# Altium PCB mainboard.PcbDoc (part 2 of 2)
Units mm, origin at the board's own origin, x right, y up, seen from the top; angles counter-clockwise.
Board outline 90.17 x 95.89 mm, 4 copper layers (F.Cu, Route2, Route15, B.Cu), stack 1.545 mm thick; 95 components, 76 nets, 509 pads, 249 vias.
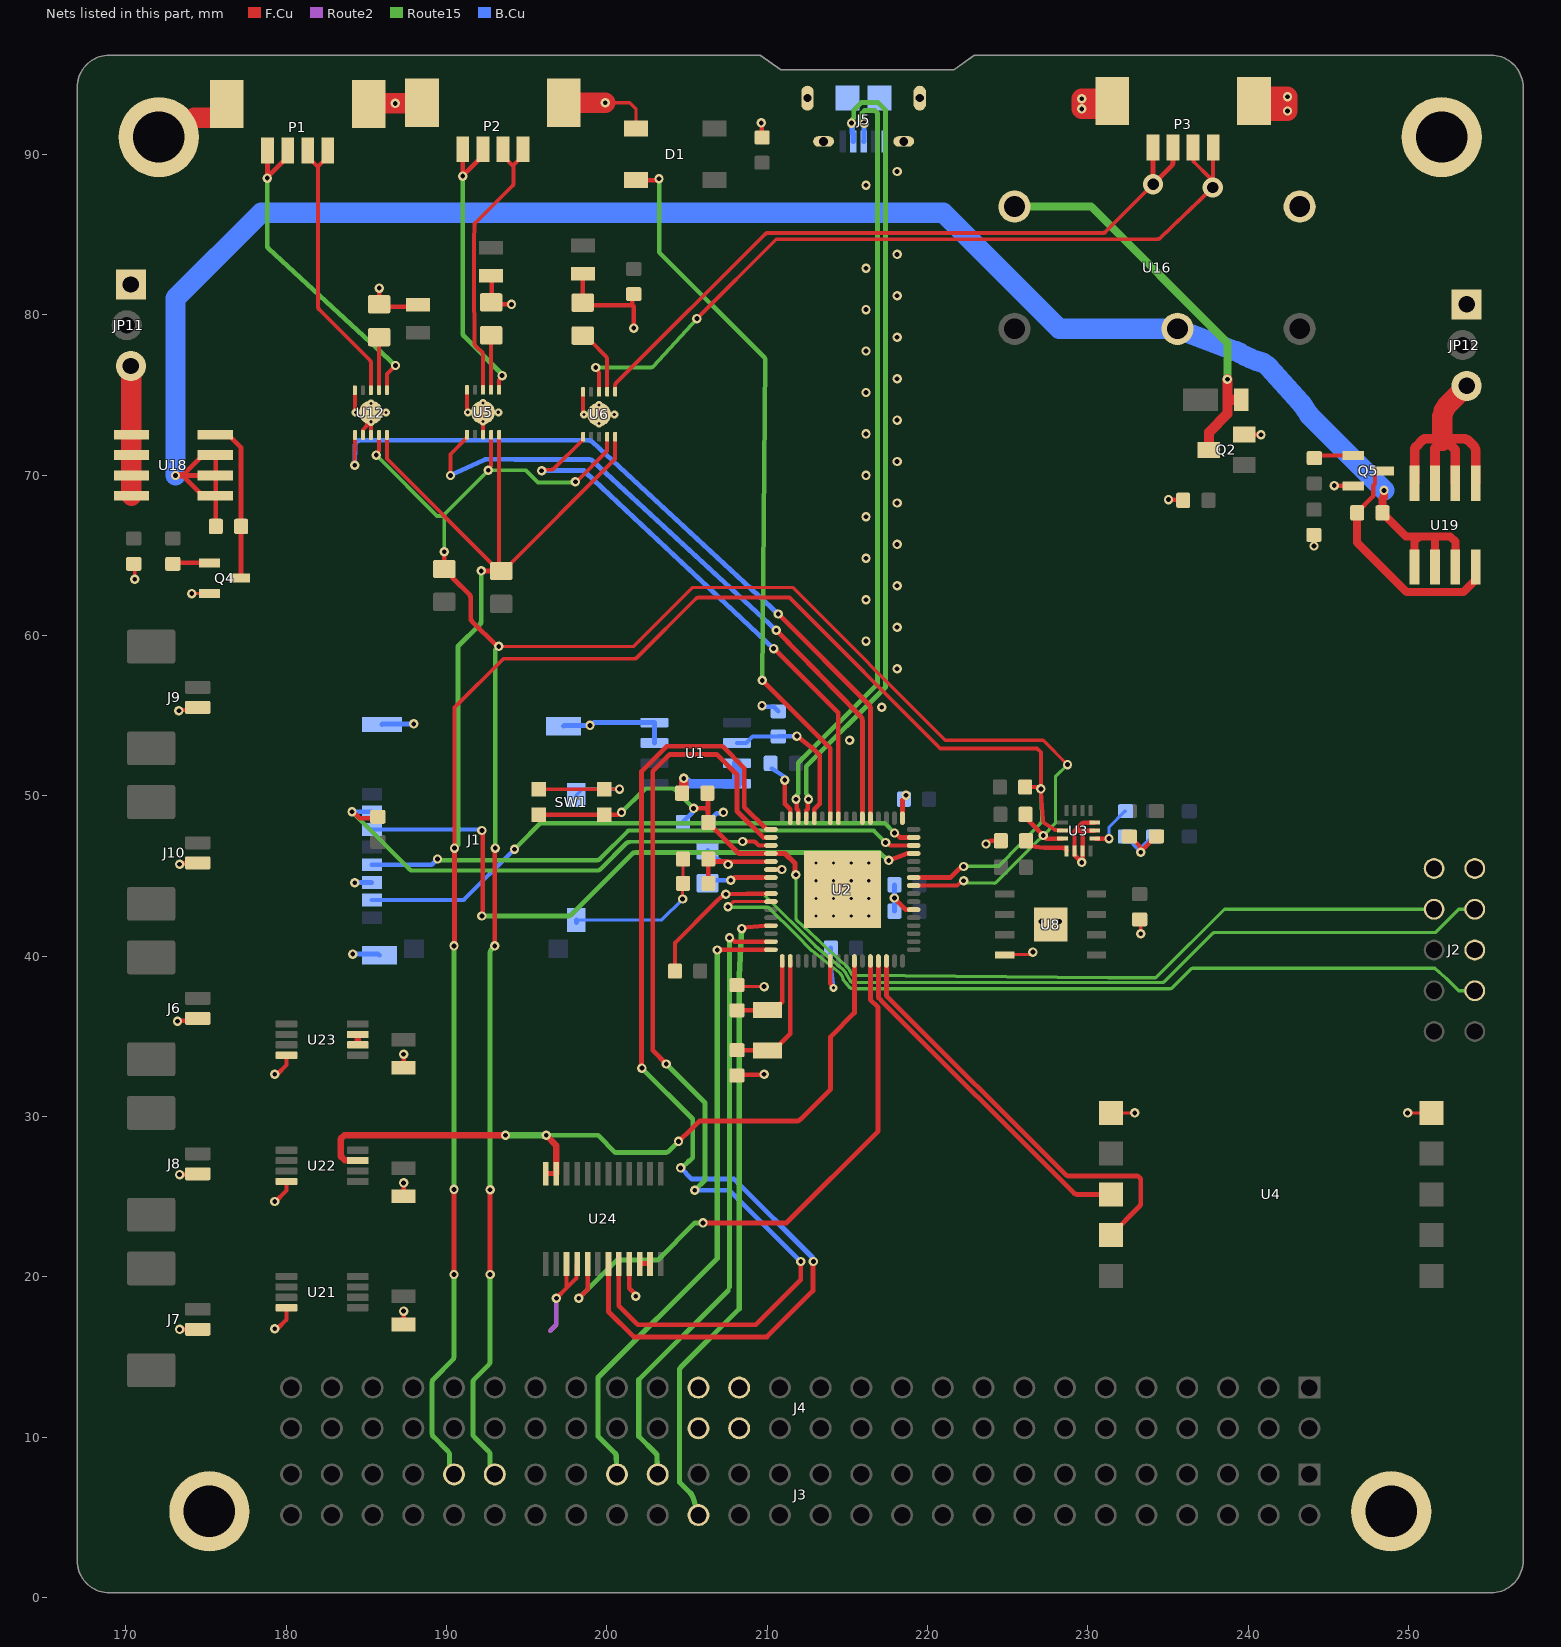
[diagram p4: the nets of this part, all layers, seen from the top]

## Via types
v1: diameter 0.584, hole 0.3, F.Cu to B.Cu, 176 vias
v2: diameter 0.584, hole 0.3, F.Cu to B.Cu, tented both sides, 42 vias
v3: diameter 0.5, hole 0.2, F.Cu to B.Cu, 29 vias
v4: diameter 1.27, hole 0.711, F.Cu to B.Cu, 2 vias

## Nets (pads, with @x,y where several pads share a name; then routed paths per layer and width w, separated by ;. In a path a pad name is that pad's centre, name@x,y a point inside that pad or via, vN(x,y) a via of type N, cw(c..) or ccw(c..) an arc to the next point about the centre after c; other vN are vias at no path point) (continued)
GB04: U2.10 U22.7 U24.23 U24.24 | length 46.9
  F.Cu w0.3: U24.24@196.19,26.441 U24.23@196.85,26.441 ; v1(204.47,28.448) 205.263,29.208 ccw(c205.055,29.424) 205.268,29.212 205.773,29.718 211.839,29.718 ccw(c211.839,30.018) 212.051,29.806 213.953,31.708 213.953,34.978 215.434,36.46 U2.10@215.434,39.702
  F.Cu w0.4: U22.7@184.47,27.249 184.445,27.274 183.658,27.274 183.395,27.537 183.395,28.595 183.629,28.829 v1(193.675,28.829) ; v1(196.215,28.829) 196.85,28.194 U24.23@196.85,26.441
  Route15 w0.3: v1(196.215,28.829) 199.456,28.829 200.533,27.752 203.65,27.752 ccw(c203.65,28.052) 203.862,27.84 v1(204.47,28.448)
  Route15 w0.4: v1(193.675,28.829) v1(196.215,28.829)
GB05: U24.10 U24.11 | length 0.7
  F.Cu w0.3: U24.10@202.057,20.803 202.085,20.83 202.685,20.83 202.692,20.838 U24.11@202.692,20.803
GND: C1.2 C2.2 C3.2 C4.1 C5.2 C7.2 C9.1 C10.2 C11.2 C12.1 C13.2 C14.2 C15.2 C16.2 C30.2 C31.2 C32.2 C33.2 C41.1 C42.1 C43.1 C44.2 D1.3 H1.1 H2.1 H3.1 H4.1 J1.6 J1.P1 J1.P2 J1.P3 J1.P4 J1.P5 J2.3 J2.5 J2.10 J4.29 J4.30 J4.31 J4.32 J5.5 J5.S1 J5.S2 J5.S3 J5.S4 J5.S5 J5.S6 J6.2 J7.2 J8.2 J9.2 J10.2 JP11.1 JP12.1 P1.MP1 P1.MP2 P2.MP1 P2.MP2 P3.MP1 P3.MP2 Q2.2 Q4.2 Q5.2 R2.1 R7.1 R25.2 R27.2 R28.2 R41.2 R69.2 R70.2 R71.2 SW1.B SW1.B' U1.3 U1.4 U2.7 U2.22 U2.33 U2.47 U2.54 U2.65 U3.2 U3.3 U3.6 U3.7 U4.5 U4.6 U5.5 U5.8 U5.11 U6.5 U6.11 U8.4 U8.9 U12.5 U12.7 U12.8 U12.11 U16.12 U21.4 U22.4 U23.4 U24.3 U24.4 U24.9 | length 142.8
  F.Cu w0.203: R27.2@170.495,64.466 170.561,64.401 v1(170.561,63.5) ; v1(174.117,62.611) 174.123,62.617 175.214,62.617 Q4.2@175.22,62.623 ; SW1.B@195.743,50.413 SW1.B'@199.843,50.413 200.192,50.419 v1(200.787,50.419) ; v1(199.898,93.218) 201.422,93.218 201.82,92.82 D1.3@201.82,91.599 ; v1(204.724,43.561) 204.724,44.504 C14.2@204.753,44.533 C12.1@204.753,46.057 ; C1.2@208.109,38.198 208.449,38.107 ccw(c208.5,38.303) 208.5,38.1 v1(209.804,38.1) ; U8.4@224.81,40.066 225.308,40.082 225.315,40.082 ccw(c225.315,40.285) 225.32,40.082 226.354,40.115 ccw(c226.347,40.318) 226.495,40.179 v1(226.565,40.253) ; U4.6@231.427,30.226 v1(232.918,30.226) ; C30.2@233.226,42.294 C30.2@233.239,42.281 ; C30.2@233.24,42.28 cw(c233.096,42.137) 233.299,42.137 v1(233.299,41.402) ; v1(249.936,30.226) U4.5@251.427,30.226
  F.Cu w0.24: U12.5@184.285,75.298 184.285,74.018 184.335,73.968 v3(184.335,73.898) ; U12.7@184.785,72.498 184.785,72.823 185.047,73.085 185.047,73.323 v3(185.285,73.323) U12.8@185.285,72.498 ; U5.5@191.278,75.314 191.278,74.06 ccw(c191.518,74.061) v3(191.328,73.914) ; U5.8@192.278,72.514 v3(192.278,73.339) ; U6.5@198.517,75.187 198.517,73.907 198.567,73.857 v3(198.567,73.787)
  F.Cu w0.272: v1@179.288,24.658 180.02,25.389 U22.4@180.02,25.949 ; v1@179.451,16.764 180.02,17.333 U21.4@180.02,18.075 ; v1@179.451,32.639 180.02,33.208 U23.4@180.02,33.823 ; v1(185.801,81.661) 185.801,80.504 188.192,80.504 C41.1@188.214,80.482 ; C33.2@187.325,17.032 v1(187.325,17.862) ; C31.2@187.325,25.033 v1(187.325,25.863) ; C32.2@187.325,33.048 v1(187.325,33.878) ; C42.1@192.786,82.437 192.814,82.148 192.814,80.645 v1(194.056,80.645) ; v1(196.85,18.669) 197.485,19.304 ; U24.3@197.485,20.803 197.485,19.304 ; U24.4@198.145,20.803 198.103,20.761 198.103,19.922 197.485,19.304 ; C43.1@198.501,82.564 198.501,80.609 198.493,80.601 201.593,80.601 ; U24.9@201.397,20.803 201.397,19.287 201.803,18.88 v1(201.803,18.796) ; v1(201.676,79.167) 201.676,80.518 201.593,80.601 ; C44.2@201.676,81.281 201.593,81.198 201.593,80.601 ; v1(209.623,91.961) 209.65,91.934 209.65,91.081 C5.2@209.677,91.053 ; v1(223.645,46.998) 223.762,47.105 ccw(c223.578,47.305) 223.77,47.113 223.771,47.114 cw(c223.963,46.922) 223.963,47.194 R41.2@224.565,47.194 ; v1@229.659,46.029 v1(229.616,45.847) 229.177,46.286 229.177,46.556 U3.2@229.166,46.567 229.166,47.709 ; v1@229.659,46.029 ccw(c229.395,46.091) 229.666,46.09 U3.3@229.666,46.567 229.666,47.802 229.693,47.829 ; U3.6@230.428,47.829 229.693,47.829 ; U3.7@230.428,48.329 229.786,48.329 ccw(c229.786,48.057) 229.595,48.25 229.245,47.9 ccw(c229.438,47.709) 229.166,47.709 ; C7.2@232.579,47.463 232.616,47.463 233.239,46.84 233.239,46.542 v1(233.299,46.482) 233.299,46.533 234.233,47.467 C3.2@234.27,47.467 ; v1(235.025,68.469) 235.641,68.469 R25.2@235.942,68.424 ; Q2.2@239.735,72.527 239.745,72.517 v1(240.789,72.517) ; v1(244.094,65.576) R28.2@244.094,66.269 ; v1(245.364,69.342) 245.378,69.328 246.531,69.328 Q5.2@246.545,69.313 ; 229.166,47.709 229.286,47.829 229.693,47.829
  F.Cu w0.3: v1(173.228,35.941) 173.255,35.968 174.458,35.968 J6.2@174.485,35.995 ; v1(173.311,55.308) 174.159,55.433 cw(c174.203,55.136) 174.203,55.436 174.412,55.436 J9.2@174.485,55.509 ; v1(173.355,16.726) J7.2@174.747,16.726 ; v1(173.355,26.378) J8.2@174.747,26.378 ; v1(173.355,45.73) 173.397,45.772 174.443,45.772 J10.2@174.485,45.813 ; C2.2@208.109,32.559 208.149,32.599 209.764,32.599 v1(209.804,32.639) ; U2.54@210.234,45.402 v1(210.917,45.402) ; v2(211.095,50.978) 211.095,49.496 211.434,49.156 U2.47@211.434,48.602 ; U2.7@213.934,39.702 213.934,38.283 214.129,38.089 v3(214.129,38.027) ; v1(217.93,43.626) 217.93,43.624 218.652,42.902 U2.22@219.134,42.902 ; U2.33@218.434,48.602 218.434,49.733 218.656,49.955 v2(218.656,50.032)
  F.Cu w1.27: H1.1@172.061,91.078 173.07,91.078 174.271,92.279 175.881,92.279 176.296,92.694 P1.MP2@176.296,93.144 ; P1.MP1@185.146,93.144 185.183,93.181 v1(186.807,93.181) 188.431,93.181 P2.MP2@188.468,93.218 ; P2.MP1@197.318,93.218 v1(199.898,93.218) ; v1(229.616,92.837) 231.096,92.837 231.511,93.252 P3.MP2@231.511,93.324 231.096,93.472 v1(229.616,93.472) v1(229.616,92.837) ; P3.MP1@240.361,93.117 240.776,92.702 v1(242.443,92.702) v1(242.443,93.599) 240.776,93.599 P3.MP1@240.361,93.324 P3.MP1@240.361,93.117
  Route2 w0.272: 196.469,16.637 196.85,17.018 v1(196.85,18.669)
  B.Cu w0.203: J1.P5@198.097,42.26 203.423,42.26 v1(204.724,43.561) ; J1.P4@198.097,50.04 198.477,50.419 v1(200.787,50.419) ; C15.2@218.516,49.784 218.508,50.027 218.513,50.032 v2(218.656,50.032)
  B.Cu w0.272: C13.2@210.28,51.7 211.19,51.13 211.095,51.035 v2(211.095,50.978) ; C10.2@213.97,40.513 213.97,39.28 ccw(c214.241,39.28) 213.971,39.252 214.015,38.821 ccw(c214.285,38.849) 214.016,38.811 v3(214.129,38.027) ; C9.1@232.337,47.463 232.375,47.463 233.299,46.539 v1(233.299,46.482) 233.359,46.542 233.359,46.757 234.065,47.463 R2.1@234.103,47.463
  B.Cu w0.3: v1(184.154,40.13) 185.747,40.13 J1.P2@185.822,40.055 ; v1@184.288,44.588 185.331,44.588 J1.6@185.342,44.6 ; J1.P1@185.972,54.445 186.011,54.483 v1(187.96,54.483) ; J1.P3@197.302,54.345 197.351,54.393 v1(198.947,54.393) 199.024,54.393 199.197,54.566 U1.4@202.965,54.566 U1.3@202.965,53.296 ; J1.P5@198.097,42.085 J1.P5@198.097,42.26 ; C4.1@206.328,48.343 206.328,48.38 206.857,48.909 207.086,48.909 ccw(c207.086,49.209) v1(207.264,48.968) ; v1(209.677,55.626) 209.754,55.626 209.822,55.558 210.405,55.558 R7.1@210.693,55.27 ; C11.2@217.93,42.801 v1(217.93,43.626) C16.2@217.93,44.451
  other v1: 179.288,16.764 179.288,24.701 179.288,32.639 227.076,42.164 228.219,42.164 184.277,44.577 215.138,53.467 217.14,55.526 218.101,57.925 216.16,59.647 218.101,60.509 216.16,62.231 218.101,63.093 216.16,64.815 218.101,65.677 216.16,67.399 218.101,68.261 216.16,69.983 218.101,70.845 216.16,72.567 218.101,73.429 216.16,75.151 218.101,76.013 216.16,77.735 218.101,78.597 216.16,80.319 218.101,81.181 216.16,82.903 218.101,83.765 216.16,88.071 218.101,88.933
  other v3: 213.034,42.502 214.134,42.502 215.234,42.502 216.334,42.502 213.034,43.602 214.134,43.602 215.234,43.602 216.334,43.602 213.034,44.702 214.134,44.702 215.234,44.702 216.334,44.702 213.034,45.802 214.134,45.802 215.234,45.802 216.334,45.802 199.517,73.212 200.467,73.787 186.235,73.898 193.228,73.914 199.517,74.362 185.285,74.473 192.278,74.489
MISO: J1.7 U2.31 | length 36.2
  F.Cu w0.279: v2(194.237,46.67) v2@194.263,46.644
  F.Cu w0.3: v2(217.939,47.682) 217.98,47.682 218.259,47.402 U2.31@219.134,47.402
  Route15 w0.272: v2(194.237,46.67) 194.529,46.963 195.849,48.282 ; 210.747,48.282 214.549,48.282 ; 214.597,48.278 ccw(c214.549,48.01) 214.549,48.282 ; v2(217.939,47.682) 217.339,48.282 214.549,48.282
  Route15 w0.279: 195.849,48.282 210.747,48.282
  B.Cu w0.272: J1.7@185.342,43.5 191.067,43.5 v2(194.237,46.67)
MOSI: J1.3 U2.29 | length 41.4
  F.Cu w0.279: v2(192.205,42.501) 192.263,42.559 192.263,47.777 v2(192.205,47.835)
  F.Cu w0.3: v2(217.58,45.974) ccw(c217.524,46.269) 217.629,45.988 218.686,46.383 cw(c218.792,46.102) 218.791,46.402 U2.29@219.134,46.402 U2.29@219.409,46.402
  Route15 w0.3: v2(192.205,42.501) 197.571,42.501 ccw(c197.571,42.801) 197.782,42.588 201.563,46.369 cw(c201.774,46.156) 201.774,46.456 217.021,46.456 217.503,45.974 v2(217.58,45.974)
  B.Cu w0.272: J1.3@185.342,47.9 192.14,47.9 v2(192.205,47.835)
NetC9_2: C9.2 U3.5 | length 3
  F.Cu w0.279: U3.5@230.453,47.329 v2(231.313,47.329)
  B.Cu w0.203: v2(231.313,47.329) 231.313,48.052 232.3,49.038 C9.2@232.337,49.038
NetC12_2: C12.2 C14.1 L1.1 U2.53 | length 7.3
  F.Cu w0.279: C14.1@206.328,44.533 C12.2@206.328,46.057 ; v2(207.56,45.717) 207.526,45.751 207.526,45.902 U2.53@210.234,45.902
  F.Cu w0.3: C12.2@206.328,46.057 206.483,45.902 v2@207.526,45.902
  B.Cu w0.279: L1.1@206.277,46.599 206.698,46.178 ccw(c206.895,46.376) 206.766,46.128 v2(207.56,45.717)
NetD1_4: D1.4 U2.42 | length 45.8
  F.Cu w0.279: D1.4@201.82,88.399 203.178,88.399 v2(203.254,88.475)
  F.Cu w0.3: v2(209.695,57.196) 213.934,52.957 U2.42@213.934,48.602
  Route15 w0.279: v2(203.254,88.475) 203.254,83.903 209.807,77.35 ; v2(209.695,57.196) 209.888,77.151 ccw(c209.608,77.154) 209.807,77.35
NetD4_A: D4.A Q2.3 U16.5 | length 24.9
  F.Cu w0.635: Q2.3@237.43,71.577 237.555,71.702 237.555,72.679 238.698,73.822 238.698,74.901 ; v2(238.698,75.981) 238.698,74.901 ; D4.A@239.573,74.701 238.899,74.701 238.698,74.901
  Route15 w0.5: U16.5@225.425,86.741 230.204,86.741 238.698,78.247 v2(238.698,75.981)
NetL1_2: L1.2 U2.55 | length 4.1
  F.Cu w0.3: v2(207.725,44.736) 207.801,44.736 207.967,44.902 U2.55@210.234,44.902
  B.Cu w0.279: L1.2@206.277,44.549 206.464,44.736 v2(207.725,44.736)
NetP1_1: P1.1 P1.2 U12.3 | length 17.8
  F.Cu w0.24: P1.2@181.346,90.244 181.346,89.844 181.949,89.241 181.993,89.241 ; P1.1@182.596,90.244 182.596,89.844 181.993,89.241 ; U12.3@185.285,75.298 185.285,76.998 ccw(c185.045,76.998) 185.215,77.167 182.063,80.319 cw(c182.233,80.489) 181.993,80.489 181.993,89.241
NetP1_3: P1.3 P1.4 U12.1 | length 20.9
  F.Cu w0.24: U12.1@186.285,75.298 186.285,76.303 v1(186.817,76.835)
  F.Cu w0.3: P1.4@178.846,90.244 v1@178.846,88.594 ; P1.3@180.086,90.234 P1.3@180.096,90.244 180.096,89.844 v1@178.846,88.594 ; v1@178.846,88.594 178.816,88.564 v1(178.816,88.519) 178.846,88.549 v1@178.846,88.594
  Route15 w0.3: v1(178.816,88.519) 178.816,84.333 ccw(c179.116,84.333) 178.913,84.111 v1(186.817,76.835)
NetP2_1: P2.1 P2.2 U5.3 | length 17.8
  F.Cu w0.24: U5.3@192.278,75.314 192.278,75.494 192.27,76.092 cw(c192.51,76.094) 192.27,76.094 192.27,77.531 ccw(c192.03,77.531) 192.182,77.717 191.93,77.923 cw(c192.212,78.268) 191.844,78.016 191.783,78.106 cw(c191.981,78.241) 191.741,78.24 191.716,82.012 191.716,84.612 cw(c192.036,84.612) 191.716,84.62 191.741,85.576 cw(c191.981,85.57) 191.811,85.739 194.113,88.041 ccw(c193.943,88.21) 194.183,88.21 194.183,89.253 ; P2.2@193.518,90.318 193.518,89.918 194.183,89.253 ; P2.1@194.768,90.318 194.768,89.918 194.183,89.333 194.183,89.253
NetP2_3: P2.3 P2.4 U5.1 | length 18.3
  F.Cu w0.24: U5.1@193.278,75.314 193.278,75.92 193.466,76.108 v1(193.466,76.201)
  F.Cu w0.3: v1(191.008,88.646) v1@191.008,88.658 ; P2.4@191.018,90.318 191.018,88.783 191.008,88.773 v1@191.008,88.658 ; P2.3@192.268,90.318 192.268,89.918 v1@191.008,88.658
  Route15 w0.3: v1(191.008,88.646) 191.008,78.863 ccw(c191.308,78.864) 191.095,78.653 193.382,76.366 cw(c193.17,76.154) 193.466,76.203 v1(193.466,76.201)
NetP3_1: P3.1 P3.2 U6.3 | length 50.2
  F.Cu w0.24: v1(199.311,76.708) 199.311,76.615 199.447,76.479 cw(c199.277,76.309) 199.517,76.309 U6.3@199.517,75.187 ; v1(205.613,79.756) 210.566,84.709 213.331,84.709 ; 213.332,84.709 234.34,84.709 ccw(c234.34,84.949) 234.506,84.776 v4(237.793,87.935) ; P3.2@236.561,90.424 236.561,89.674 ccw(c236.801,89.674) 236.631,89.505 237.585,88.551 cw(c237.415,88.381) 237.655,88.381 237.655,88.073 v4(237.793,87.935) ; P3.1@237.811,90.424 237.793,90.406 v4(237.793,87.935)
  Route15 w0.24: v1(199.311,76.708) 202.722,76.708 ccw(c202.722,76.948) 202.899,76.786 v1(205.613,79.756)
NetP3_3: P3.3 P3.4 U6.1 | length 44.3
  F.Cu w0.24: U6.1@200.509,75.171 200.509,75.57 cw(c200.749,75.569) 200.578,75.737 209.861,85.02 cw(c210.03,84.85) 210.03,85.09 230.914,85.09 ccw(c230.914,85.33) 231.083,85.16 v4(234.061,88.138)
  F.Cu w0.3: P3.4@234.061,90.424 v4(234.061,88.138) 235.224,89.301 ccw(c235.011,89.512) 235.311,89.512 P3.3@235.311,90.424
NetQ4_1: Q4.1 R32.1 | length 2.3
  F.Cu w0.272: R32.1@172.934,64.466 172.996,64.528 Q4.1@175.22,64.528
NetQ4_3: Q4.3 R37.1 U18.4 | length 10.1
  F.Cu w0.3: U18.4@175.59,72.517 176.39,72.517 177.19,71.717 R37.1@177.19,66.802 177.19,63.667 Q4.3@177.1,63.576
NetQ5_1: Q5.1 R33.1 | length 2.5
  F.Cu w0.272: R33.1@244.119,71.053 244.284,71.218 Q5.1@246.545,71.218
NetQ5_3: Q5.3 R38.1 U19.4 | length 15.2
  F.Cu w0.272: R38.1@246.79,67.647 246.79,67.684 247.784,68.679 247.784,69.343 247.9,69.458 247.9,70.122 248.044,70.266 Q5.3@248.425,70.266
  F.Cu w0.508: R38.1@246.79,67.647 246.79,65.798 249.878,62.71 253.423,62.71 254.181,63.468 U19.4@254.181,64.269
NetR41_1: R41.1 U3.1 | length 2.8
  F.Cu w0.279: R41.1@226.14,47.194 226.438,46.858 227.275,46.751 ccw(c227.31,47.029) 227.31,46.749 228.484,46.749 U3.1@228.666,46.567
NetR42_2: R42.2 U1.7 U1.8 | length 5.7
  F.Cu w0.6: R42.2@204.692,50.162 204.79,50.26 v2(204.79,51.085)
  B.Cu w0.6: v2(204.79,51.085) 205.119,50.756 U1.8@208.115,50.756 U1.7@208.115,52.026
NetR69_1: R69.1 U12.2 | length 3.5
  F.Cu w0.24: U12.2@185.785,75.298 185.785,78.299 R69.1@185.786,78.754
NetR70_1: R70.1 U5.2 | length 3.6
  F.Cu w0.24: U5.2@192.778,75.314 192.778,75.494 192.77,76.092 cw(c193.01,76.094) 192.77,76.094 192.77,78.412 R70.1@192.786,78.867
NetR71_1: R71.1 U6.2 | length 4.3
  F.Cu w0.24: R71.1@198.493,78.851 198.943,78.426 ccw(c199.215,78.553) 199.002,78.342 199.92,77.424 cw(c199.707,77.213) 200.007,77.213 200.007,75.994 ccw(c200.307,75.995) 200.007,75.976 cw(c199.313,75.928) 200.007,75.88 ccw(c200.307,75.86) 200.007,75.862 U6.2@200.007,75.173
NetU23_6: U23.6 U23.7 | length 0.7
  F.Cu w0.4: U23.6@184.47,34.473 184.47,35.098 184.495,35.098 U23.7@184.47,35.123
"POT CLK": U2.50 U24.8 | length 64.2
  F.Cu w0.3: U24.8@200.736,20.803 200.736,18.212 201.93,17.018 209.296,17.018 212.09,19.812 v1(212.09,20.955) ; v1(203.708,33.274) 202.864,34.118 202.864,51.517 203.925,52.578 206.855,52.578 208.115,51.317 208.115,49.039 209.752,47.402 U2.50@210.234,47.402
  Route15 w0.3: v1(203.708,33.274) 206.121,30.861 206.121,26.035 v1(205.486,25.4)
  B.Cu w0.3: v1(205.486,25.4) 207.521,25.4 cw(c207.521,25.1) 207.732,25.313 v1(212.09,20.955)
"POT CS": U2.12 U24.5 | length 36.2
  F.Cu w0.3: v1(198.247,18.669) 198.806,19.228 U24.5@198.806,20.803 ; v1(205.994,23.368) 211.201,23.368 216.916,29.083 216.916,36.808 216.434,37.29 U2.12@216.434,39.702
  Route15 w0.3: v1(198.247,18.669) 200.624,21.046 203.164,21.046 205.486,23.368 v1(205.994,23.368)
"POT SDI": U2.49 U24.7 | length 68.9
  F.Cu w0.3: U24.7@200.101,20.803 200.101,17.831 201.676,16.256 209.983,16.256 212.852,19.125 v1@212.852,20.955 ; v1(202.184,33.02) 202.165,33.039 202.165,51.517 203.734,53.086 207.213,53.086 208.573,51.726 208.573,49.288 209.959,47.902 U2.49@210.234,47.902
  Route15 w0.3: v1(202.184,33.02) 205.359,29.845 205.359,27.432 205.147,27.22 205.097,27.22 204.674,26.797 v1(204.597,26.797)
  B.Cu w0.3: v1(204.597,26.797) 205.298,26.096 207.933,26.096 212.823,21.206 212.823,21.009 v1(212.877,20.955)
R\E\S\E\T\: C4.2 J2.9 R3.2 R42.1 SW1.A SW1.A' U2.52 | length 67.8
  F.Cu w0.272: SW1.A@195.743,48.813 SW1.A'@199.843,48.813 200.679,48.813 200.752,48.886 cw(c200.944,48.694) 200.87,48.955 v1(200.914,48.968) ; v1(205.412,49.214) 206.156,49.214 206.297,49.073
  F.Cu w0.3: R42.1@206.267,50.162 206.297,50.132 206.297,49.073 206.297,48.336 R3.2@206.328,48.305 ; R3.2@206.328,48.343 R3.2@206.328,48.305 ; v2(211.789,45.082) 211.735,45.137 211.735,45.776 211.109,46.402 U2.52@210.234,46.402 208.231,46.402 R3.2@206.328,48.305
  Route15 w0.203: v2(211.789,45.082) 211.789,42.381 ccw(c211.992,42.381) 211.849,42.238 ccw(c211.992,42.381) 211.853,42.233 214.94,39.362 cw(c214.129,38.489) 215.219,38.971 215.239,38.925 ccw(c215.425,39.007) 215.422,38.804 231.272,38.647 231.274,38.647 234.154,38.647 ccw(c234.154,38.85) 234.298,38.707 238.517,42.926 J2.9@251.587,42.926
  Route15 w0.272: v1(200.914,48.968) 202.326,50.376 cw(c202.519,50.184) 202.519,50.456 204.058,50.456 cw(c204.058,50.184) 204.25,50.376 v1(205.412,49.214)
  B.Cu w0.272: C4.2@204.753,48.343 204.753,48.38 205.353,48.98 205.353,49.154 v1(205.412,49.214)
RTS_RADIO: J3.32 U2.61 | length 40.4
  F.Cu w0.3: v1(208.409,41.72) 208.409,41.777 209.847,41.891 ccw(c209.825,42.19) 209.874,41.894 209.875,41.895 cw(c209.959,41.402) 209.958,41.902 209.959,41.902 U2.61@210.234,41.902
  Route15 w0.328: 205.311,6.372 205.348,6.302 cw(c205.057,6.151) 205.369,6.25 205.369,6.249 J3.32@205.711,5.143 ; 205.311,6.373 ccw(c205.02,6.221) 205.252,6.453 205.23,6.476 205.23,6.497 205.229,6.498 204.532,7.195 204.532,14.152 cw(c204.86,14.151) 204.627,14.381 208.254,18.008 208.254,38.739 cw(c208.581,38.738) 208.254,38.755 208.406,41.72 v1(208.409,41.72)
RX_GPS: U2.14 U4.9 | length 27
  F.Cu w0.3: U2.14@217.434,39.702 217.434,38.486 217.437,38.484 217.437,37.543 228.605,26.376 ccw(c228.815,26.589) 228.814,26.289 233.02,26.289 cw(c233.02,26.01) 233.299,26.011 233.299,24.594 cw(c233.02,24.594) 233.217,24.396 U4.9@231.427,22.606
RX_RADIO: J3.35 U2.64 | length 39.6
  F.Cu w0.3: v1(206.883,40.386) 207.775,40.402 U2.64@210.234,40.402
  Route15 w0.328: J3.35@200.631,7.683 200.589,8.805 ccw(c200.261,8.792) 200.495,9.022 200.494,9.023 199.452,10.065 199.452,13.717 206.883,21.148 v1(206.883,40.386)
SCK: J1.5 U2.30 | length 35.1
  F.Cu w0.272: v2(217.381,47.088) 217.466,47.088 217.652,46.902 U2.30@219.134,46.902
  Route15 w0.272: v2(189.437,46.057) 189.521,46.057 189.59,45.988 199.387,45.988 ccw(c199.387,46.26) 199.578,46.067 201.345,47.834 216.636,47.834 v2(217.381,47.088)
  B.Cu w0.272: J1.5@185.342,45.7 189.08,45.7 v2(189.437,46.057)
SCL: J3.43 R45.2 R68.1 U2.26 U3.13 U5.10 U6.10 U12.10 | length 162.1
  F.Cu w0.127: v1(190.471,40.64) v1@190.5,40.669
  F.Cu w0.24: U12.10@186.285,72.498 186.285,71.02 193.28,64.025 193.288,64.017 193.388,64.017 R68.1@193.413,64.017 ; v1(190.5,46.736) 190.5,55.499 193.548,58.547 201.704,58.547 ccw(c201.704,58.787) 201.873,58.617 205.543,62.287 cw(c205.712,62.117) 205.711,62.357 ; U5.10@193.278,72.514 193.278,64.152 R68.1@193.413,64.017 ; U6.10@200.517,72.387 200.517,70.996 193.538,64.017 R68.1@193.413,64.017 ; 205.712,62.357 211.391,62.357 220.789,52.959 226.822,52.959 227.066,52.715 v2(227.066,50.429) ; R45.2@226.085,50.546 R45.2@226.179,50.546 ; R45.2@226.162,50.895 226.138,50.717 ccw(c226.376,50.683) R45.2@226.179,50.546 ; U3.13@228.404,47.829 228.033,47.866 cw(c228.067,48.204) 227.886,47.916 227.572,48.114 ccw(c227.206,47.534) 227.559,48.122 227.33,48.259 cw(c227.473,48.499) 227.194,48.494 ccw(c226.915,48.487) 227.193,48.505 227.083,50.183 v2(227.066,50.429) ; R45.2@226.179,50.546 226.856,50.546 226.973,50.429 v2(227.066,50.429)
  F.Cu w0.3: v1(190.471,20.145) v1(190.471,25.456) ; v1@190.5,40.669 v1(190.5,46.736) ; v1(192.163,64.025) R68.1@193.267,64.025 ; R68.1@193.002,63.815 ccw(c193.076,64.106) R68.1@193.288,63.894 ; R68.1@193.219,64.061 ccw(c193.387,64.232) R68.1@193.267,64.025 ; U2.26@219.134,44.902 220.422,44.902 221.425,44.902 222.043,45.52 222.177,45.52 v2(222.25,45.593) ; R68.1@193.267,64.025 ccw(c193.387,64.232) 193.386,63.992 193.413,63.992 193.388,64.017 193.38,64.025 193.28,64.025 R68.1@193.267,64.025
  Route15 w0.22: v2(222.25,45.593) 224.342,45.593 ccw(c224.342,45.813) 224.502,45.661 227.021,48.259 cw(c227.18,48.107) 227.036,48.274 ccw(c226.859,48.48) 227.13,48.48 227.13,48.649 ccw(c226.859,48.649) 227.13,48.659 v2(227.066,50.429)
  Route15 w0.3: J3.43@190.471,7.683 190.269,7.885 cw(c190.481,8.097) 190.181,8.096 190.181,8.904 ccw(c189.881,8.904) 190.094,9.115 189.191,10.018 cw(c189.403,10.231) 189.103,10.231 189.103,13.415 cw(c189.403,13.415) 189.19,13.627 190.383,14.82 ccw(c190.171,15.032) 190.471,15.032 v1(190.471,20.145) ; v1(190.471,25.456) v1(190.471,40.64) ; v1(190.5,46.736) 190.717,46.953 190.717,59.317 192.075,60.675 ccw(c191.863,60.887) 192.163,60.887 v1(192.163,64.025)
  B.Cu w0.24: v2(222.25,45.593) v2@222.303,45.593
SD_CS: J1.2 R51.1 U2.51 | length 32
  F.Cu w0.272: v2(184.103,49.003) 184.187,49.003 184.591,48.6 185.63,48.6 R51.1@185.718,48.687 R51.1@185.379,48.989 ; v2(208.466,47.152) 209.11,47.149 cw(c209.109,46.877) 209.301,47.069 209.469,46.902 U2.51@210.234,46.902
  Route15 w0.272: v2(184.103,49.003) 187.687,45.419 ; 187.688,45.418 ccw(c187.879,45.611) 187.879,45.339 199.404,45.339 ccw(c199.404,45.611) 199.597,45.419 201.215,47.037 cw(c201.407,46.845) 201.406,47.117 v2(208.466,47.152)
  B.Cu w0.272: v2(184.103,49.003) 184.106,49 J1.2@185.342,49
SDA: J3.41 R44.2 R67.1 U2.25 U3.14 U5.9 U6.9 U12.9 | length 143.9
  F.Cu w0.203: v1(193.257,59.317) 201.684,59.317 205.359,62.992 211.582,62.992 221.107,53.467 227.203,53.467 v1(228.727,51.943)
  F.Cu w0.24: v1(185.619,71.247) 185.619,71.34 185.785,71.506 U12.9@185.785,72.498 ; v1(192.604,70.297) 192.604,70.39 192.77,70.556 U5.9@192.77,72.371 ; v1(198.036,69.582) 198.106,69.582 200.017,71.493 U6.9@200.017,72.387 ; U2.25@219.134,44.402 221.855,44.402 222.157,44.704 v2(222.25,44.704)
  F.Cu w0.279: R44.2@226.111,48.845 226.111,48.629 226.617,48.123 v2(227.219,47.521) ; v2@227.206,47.534 227.412,47.329 U3.14@228.404,47.329
  F.Cu w0.3: v1(189.857,65.219) R67.1@189.857,64.144 189.857,64.119 190.358,63.639 ccw(c190.575,63.74) 190.404,63.572 191.439,62.537 cw(c191.269,62.368) 191.509,62.369 191.509,61.067 ccw(c191.749,61.067) 191.579,60.897 193.09,59.386 ccw(c193.258,59.557) v1(193.257,59.317) ; v1(192.721,20.145) v1(192.721,25.431) ; v1(193.011,40.64) 193.011,46.707 v1(193.04,46.736)
  Route15 w0.203: v2@222.504,44.577 224.136,44.55 ccw(c224.139,44.754) 224.283,44.61 ; 224.283,44.611 226.713,47.04 cw(c226.856,46.896) 226.716,47.044 v2(227.219,47.521) 227.973,48.275 227.973,51.189 v1(228.727,51.943)
  Route15 w0.24: v1(185.619,71.247) 189.415,67.451 189.857,67.451 ; v1(189.857,65.219) 189.857,67.451 ; v1(198.036,69.582) 198.001,69.547 195.712,69.547 194.962,70.297 v1(192.604,70.297) 189.927,67.62 ccw(c190.097,67.451) 189.857,67.451
  Route15 w0.3: v1(192.721,20.145) 192.721,14.737 cw(c192.421,14.737) 192.634,14.526 191.73,13.622 ccw(c191.943,13.41) 191.643,13.41 191.643,10.225 ccw(c191.943,10.225) 191.731,10.013 192.634,9.11 cw(c192.421,8.899) 192.721,8.899 192.721,8.096 ccw(c193.021,8.097) 192.809,7.885 J3.41@193.011,7.683 ; v1(192.721,25.431) 192.722,40.226 cw(c193.022,40.226) 192.809,40.438 v1(193.011,40.64) ; v1(193.04,46.736) 193.04,59.1 v1(193.257,59.317)
SWCLK: J2.4 R4.2 U2.57 | length 60.3
  F.Cu w0.272: R4.2@203.943,39.411 R4.2@204.245,39.072 204.245,40.827 206.762,43.344 ; 206.763,43.345 cw(c206.954,43.151) 206.769,43.351 207.246,43.791 cw(c207.43,43.592) v1(207.425,43.863)
  F.Cu w0.3: v1(207.425,43.863) 209.952,43.902 cw(c209.959,43.402) 209.959,43.902 U2.57@210.234,43.902
  Route15 w0.203: v1(207.425,43.863) 207.877,43.889 cw(c207.889,43.687) 207.889,43.89 209.652,43.89 cw(c209.652,43.687) 209.729,43.874 209.734,43.873 cw(c209.656,43.685) 209.797,43.832 ; 209.798,43.831 209.799,43.83 212.987,40.642 ccw(c213.13,40.786) 212.995,40.634 ; 212.995,40.634 ccw(c213.13,40.786) 212.998,40.631 214.71,39.175 cw(c214.129,38.489) 214.952,38.851 214.971,38.806 ccw(c215.425,39.007) 215.003,38.746 215.186,38.45 ccw(c215.359,38.557) 215.215,38.413 ; 215.216,38.413 ccw(c215.359,38.557) 215.358,38.354 234.612,38.354 ccw(c234.612,38.557) 234.755,38.413 237.75,41.408 cw(c237.894,41.264) 237.893,41.468 ; 237.894,41.468 251.658,41.468 253.117,42.926 J2.4@254.127,42.926
SWDIO: J2.2 U2.58 | length 52.6
  F.Cu w0.203: v2(207.552,43.086) 207.693,43.208 ccw(c207.56,43.362) 207.702,43.217 207.887,43.402 U2.58@210.234,43.402
  Route15 w0.203: v2(207.552,43.086) 207.584,43.054 209.989,43.054 cw(c209.989,42.851) 210.094,43.025 210.098,43.023 cw(c209.993,42.848) 210.135,42.994 210.136,42.993 211.745,41.386 212.784,40.346 ccw(c213.135,40.698) 212.792,40.339 ccw(c212.932,40.486) 212.801,40.331 ; 212.801,40.331 ccw(c212.932,40.486) 212.805,40.327 214.508,38.962 cw(c214.129,38.489) 214.723,38.606 214.728,38.578 ccw(c214.928,38.617) 214.771,38.488 214.977,38.24 ccw(c215.359,38.557) 214.994,38.22 215.163,38.038 ccw(c215.312,38.176) 215.168,38.033 ; 215.169,38.032 ccw(c215.312,38.176) 215.311,37.973 235.12,37.973 ccw(c235.12,38.176) 235.264,38.033 236.415,39.184 cw(c236.558,39.04) 236.557,39.243 ; 236.558,39.243 251.635,39.243 252.301,38.659 cw(c251.587,37.846) 252.353,38.609 253.117,37.846 J2.2@254.127,37.846
TX_GPS: U2.13 U4.8 | length 21.8
  F.Cu w0.3: U2.13@216.934,39.702 216.934,37.414 217.078,37.27 ccw(c217.305,37.466) 217.092,37.255 229.114,25.233 ccw(c229.325,25.446) 229.323,25.146 U4.8@231.427,25.146
TX_RADIO: J3.33 U2.63 | length 38.7
  F.Cu w0.3: v1(207.645,41.148) 207.722,41.148 207.968,40.902 U2.63@210.234,40.902
  Route15 w0.328: J3.33@203.171,7.683 203.129,8.805 ccw(c202.801,8.792) 203.035,9.022 203.034,9.023 201.992,10.065 201.992,13.581 207.549,19.138 ; 207.644,19.369 207.644,34.804 cw(c207.972,34.802) 207.645,34.808 207.645,34.83 ccw(c207.317,34.836) 207.645,34.836 v1(207.645,41.148)
USB_D_N: J5.2 U2.45 | length 50.8
  F.Cu w0.3: U2.45@212.434,48.602 212.434,49.084 212.524,49.173 212.524,49.73 v1(212.578,49.784)
  Route15 w0.3: v1(212.578,49.784) 212.524,49.838 212.524,50.035 212.436,50.123 212.436,51.839 217.382,56.785 217.382,92.763 216.912,93.233 215.867,93.233 215.397,92.763 215.397,92.25 215.38,92.267 215.321,92.208 215.321,92.015 v1(215.252,91.947)
  B.Cu w0.328: v1(215.252,91.947) 215.301,91.898 215.301,91.341 215.362,91.28 J5.2@215.362,90.805
USB_D_P: J5.3 U2.46 | length 49.1
  F.Cu w0.3: v1(211.791,49.784) 211.845,49.73 211.845,49.173 211.934,49.084 U2.46@211.934,48.602
  Route15 w0.3: v1(211.791,49.784) 211.845,49.838 211.845,50.035 211.933,50.123 211.933,52.047 216.879,56.993 216.879,92.554 216.703,92.73 216.076,92.73 215.9,92.554 215.9,92.25 215.917,92.267 215.99,92.193 215.99,92.001 v1(216.045,91.947)
  B.Cu w0.328: J5.3@216.012,90.805 216.028,90.821 216.028,91.931 v1(216.045,91.947)
VBURN1: JP11.3 U18.5 U18.6 U18.7 U18.8 | length 8.1
  F.Cu w1.27: JP11.3@170.315,76.802 170.336,76.78 170.336,68.729 U18.8@170.358,68.707
VBURN2: JP12.3 U19.5 U19.6 U19.7 U19.8 | length 18.6
  F.Cu w0.272: 252.095,72.136 252.222,72.263
  F.Cu w0.6: U19.8@250.371,69.501 250.371,71.571 cw(c250.643,71.57) 250.45,71.761 250.873,72.184 cw(c251.065,71.991) 251.065,72.263 253.506,72.263 ; U19.7@251.641,69.501 251.641,71.682 252.095,72.136 ; 252.222,72.263 252.911,71.574 U19.6@252.911,69.501 ; 253.534,72.252 253.698,72.184 254.102,71.78 254.181,71.588 U19.5@254.181,69.501
  F.Cu w1.27: 252.095,72.136 252.095,73.515 cw(c253.365,73.515) 252.467,74.413 JP12.3@253.619,75.565
VBURN_A_IN: R37.2 R38.2 U16.11 U18.1 U18.2 U18.3 U19.1 U19.2 U19.3 | length 120.6
  F.Cu w0.3: U18.1@175.59,68.707 174.79,68.707 173.574,69.923 173.155,69.923 v1(173.101,69.977) ; U18.2@175.59,69.977 v1(173.101,69.977) ; R37.2@175.616,66.802 175.616,71.222 U18.3@175.59,71.247 174.79,71.247 173.574,70.031 173.155,70.031 v1(173.101,69.977)
  F.Cu w0.508: 248.365,68.529 R38.2@248.365,67.647 248.365,67.609 248.548,67.426 248.586,67.426 249.831,66.18 250.669,66.18 ; 248.466,68.631 v2(248.466,69.044) ; U19.1@250.371,64.269 250.371,65.883 250.669,66.18 ; U19.2@251.641,64.269 251.641,66.166 251.627,66.18 ; U19.3@252.911,64.269 252.911,65.854 252.585,66.18 251.627,66.18 ; 250.669,66.18 251.627,66.18
  B.Cu w1.27: v1(173.101,69.977) 173.101,81.026 178.435,86.36 220.97,86.36 228.209,79.121 U16.11@235.585,79.121 239.255,77.719 cw(c238.803,76.532) 239.458,77.62 ccw(c242.134,82.058) 240.473,77.149 ccw(c240.878,78.353) 240.505,77.139 240.725,77.071 cw(c240.352,75.857) 241.298,76.705 243.24,74.546 cw(c242.296,73.697) 243.345,74.412 ccw(c244.392,75.132) 243.346,74.411 243.769,73.795 ccw(c244.815,74.515) 243.915,73.619 243.917,73.617 248.491,69.044 v2(248.466,69.044)
WDT_WDI: R7.2 U1.6 U2.44 | length 9.8
  F.Cu w0.3: v2(211.853,53.723) 212.801,52.99 ; 212.801,52.99 cw(c212.617,52.753) 212.829,52.965 213.274,52.52 213.274,49.496 212.934,49.156 U2.44@212.934,48.602
  B.Cu w0.272: U1.6@208.115,53.296 208.69,53.296 209.09,53.696 R7.2@210.693,53.696 210.707,53.709 211.839,53.709 v2(211.853,53.723)
XFault: U2.37 U12.6 | length 49
  F.Cu w0.24: v1(184.277,70.612) 184.285,72.377 ccw(c183.985,72.379) 184.285,72.379 U12.6@184.285,72.498
  F.Cu w0.3: v1(210.693,61.341) 216.346,55.688 cw(c216.134,55.475) 216.434,55.475 U2.37@216.434,48.602
  B.Cu w0.3: v1(184.277,70.612) 184.303,71.873 cw(c184.603,71.868) 184.603,72.168 198.861,72.168 cw(c198.861,71.868) 199.072,72.082 ; 199.072,72.081 ccw(c199.282,72.296) 199.079,72.074 v1(210.693,61.341)
XTAL1: C1.1 U2.1 Y1.1 | length 5.6
  F.Cu w0.3: C1.1@208.109,36.623 210.008,36.623 Y1.1@210.014,36.629 210.414,36.629 210.934,37.149 U2.1@210.934,39.702
XTAL2: C2.1 U2.2 Y1.2 | length 8.3
  F.Cu w0.3: C2.1@208.109,34.134 210.008,34.134 Y1.2@210.014,34.129 210.414,34.129 211.434,35.149 U2.2@211.434,39.702
YFault: U2.38 U5.6 | length 41.5
  F.Cu w0.24: v1(190.246,69.977) 190.246,71.302 191.278,72.334 U5.6@191.278,72.514
  F.Cu w0.3: v1(210.566,60.325) 215.849,54.917 cw(c215.634,54.707) 215.934,54.707 U2.38@215.934,48.602
  B.Cu w0.3: v1(190.246,69.977) 192.313,70.929 cw(c192.604,70.297) 192.616,70.993 194.258,70.965 cw(c194.255,70.665) 194.26,70.965 198.913,70.965 cw(c198.913,70.665) 199.125,70.877 199.126,70.876 v1(210.566,60.325)
ZFault: U2.41 U6.6 | length 34.7
  F.Cu w0.24: v1(195.932,70.269) 195.998,70.334 196.545,70.334 ccw(c196.545,70.574) 196.714,70.404 198.448,72.138 ccw(c198.277,72.306) 198.517,72.306 U6.6@198.517,72.387
  F.Cu w0.3: v1(210.4,59.179) 210.446,59.179 214.434,55.19 U2.41@214.434,48.602
  B.Cu w0.3: v1(195.932,70.269) 195.942,70.278 198.579,70.278 198.689,70.168 ccw(c198.9,70.381) 198.693,70.164 ccw(c198.902,70.38) 198.695,70.162 v1(210.4,59.179)
pads on no net: D1.2 J1.1 J1.8 J1.DT J1.SW J2.6 J2.7 J2.8 J3.01 J3.02 J3.03 J3.04 J3.05 J3.06 J3.07 J3.08 J3.09 J3.10 J3.11 J3.12 J3.13 J3.14 J3.15 J3.16 J3.17 J3.18 J3.19 J3.20 J3.21 J3.22 J3.23 J3.24 J3.25 J3.26 J3.28 J3.29 J3.30 J3.31 J3.34 J3.36 J3.37 J3.38 J3.39 J3.40 J3.42 J3.44 J3.45 J3.46 J3.47 J3.48 J3.49 J3.50 J3.51 J3.52 J4.01 J4.02 J4.03 J4.04 J4.05 J4.06 J4.07 J4.08 J4.09 J4.10 J4.11 J4.12 J4.13 J4.14 J4.15 J4.16 J4.17 J4.18 J4.19 J4.20 J4.21 J4.22 J4.23 J4.24 J4.33 J4.34 J4.35 J4.36 J4.37 J4.38 J4.39 J4.40 J4.41 J4.42 J4.43 J4.44 J4.47 J4.48 J4.49 J4.50 J4.51 J4.52 J5.1 J5.4 J6.MP J7.MP J8.MP J9.MP J10.MP JP11.2 JP12.2 U1.1 U1.5 U2.3 U2.16 U2.27 U2.35 U2.36 U2.39 U2.40 U2.43 U2.59 U3.4 U3.9 U3.10 U3.11 U4.3 U4.7 U4.10

## Polygon pours and split planes (outlines as drawn)
3.3V on B.Cu "B.Cu-GND-1" (solid, remove dead copper, pour order 41): 168.97,96.184 209.565,96.184 210.845,95.285 221.64,95.285 222.91,96.174 255.14,96.184 255.453,96.159 255.758,96.086 256.048,95.966 256.316,95.802 256.555,95.598 256.758,95.359 256.922,95.092 257.043,94.802 257.14,94.184 257.14,2.299 257.116,1.986 257.043,1.681 256.922,1.391 256.758,1.123 256.555,0.884 256.316,0.681 256.048,0.517 255.758,0.397 255.14,0.299 168.97,0.299 168.658,0.323 168.352,0.397 168.062,0.517 167.795,0.681 167.556,0.884 167.352,1.123 167.188,1.391 167.068,1.681 166.97,2.299 166.97,94.184 166.995,94.497 167.068,94.802 167.188,95.092 167.352,95.359 167.556,95.598 167.795,95.802 168.062,95.966 168.352,96.086
GND on B.Cu "GND_L04_P036" (solid, pour order 36): 211.762,94.958 212.813,94.955 220.262,94.986 217.689,47.115 217.786,47.019 217.375,46.609 211.455,46.609 211.455,46.863 211.444,46.874
GND on Route2 "Route2-GND" (solid, remove dead copper, pour order 38): 166.932,96.222 257.229,96.222 257.229,0.337 166.932,0.337

## Keep-outs
Edge.Cuts:
  lines w0.15: 166.97,2.299 ccw(c168.97,2.299) 168.97,0.299 ; 166.97,2.299 ccw(c168.97,2.299) 168.97,0.299 ; 166.97,2.299 166.97,94.184 ; 166.97,2.299 166.97,94.184 ; 166.97,94.184 cw(c168.97,94.184) 168.97,96.184 ; 166.97,94.184 cw(c168.97,94.184) 168.97,96.184 ; 168.97,0.299 255.14,0.299 ; 168.97,0.299 255.14,0.299 ; 168.97,96.184 209.565,96.184 ; 168.97,96.184 209.565,96.184 ; 209.565,96.184 210.845,95.285 ; 209.565,96.184 210.845,95.285 ; 210.845,95.285 221.64,95.285 ; 210.845,95.285 221.64,95.285 ; 221.64,95.285 222.91,96.174 ; 221.64,95.285 222.91,96.174 ; 222.91,96.174 255.14,96.184 ; 222.91,96.174 255.14,96.184 ; 255.14,0.299 ccw(c255.14,2.299) 257.14,2.299 ; 255.14,0.299 ccw(c255.14,2.299) 257.14,2.299 ; 255.14,96.184 cw(c255.14,94.184) 257.14,94.184 ; 255.14,96.184 cw(c255.14,94.184) 257.14,94.184 ; 257.14,2.299 257.14,94.184 ; 257.14,2.299 257.14,94.184

## Silkscreen, mask and mechanical layers (free items; w line width, h text height)
F.SilkS:
B.SilkS:
  circle w0.2: c202.619,49.613 r0.127
B.Mask:
  text "HOLLIDAY" at 210.147,92.51 h0.76 r90
Cmts.User:
  text "Passive grid = 10mils / IC grid = 50 mils / Fanout grid = 2mil RFM," at 0,80.064 h0.77

## Dimensions
257.14,94.184 to 166.97,94.184 on Dwgs.User
255.14,0.299 to 255.14,96.184 on Dwgs.User

## Text inside footprints (layer, text, board x,y; h text height)
C1: F.Fab "C6" at 207.855,37.643 h0.89 r270
C2: F.Fab "C6" at 208.363,33.115 h0.89 r90
C3: F.Fab "C6" at 234.525,48.023 h0.89 r90
C4: F.Fab "C6" at 205.308,48.597 h0.89 r180
C5: F.Fab "C6" at 209.423,90.498 h0.89 r270
C7: F.Fab "C6" at 232.833,48.018 h0.89 r90
C9: F.Fab "C6" at 232.592,48.483 h0.89 r90
C10: F.Fab "C6" at 214.525,40.767 h0.89 r180
C11: F.Fab "C6" at 218.487,43.055 h0.89 r180
C12: F.Fab "C6" at 205.772,46.311 h0.89 r180
C13: F.Fab "C6" at 210.769,52.28 h0.89 r180
C14: F.Fab "C6" at 205.308,44.279 h0.89
C15: F.Fab "C6" at 219.071,50.038 h0.89 r180
C16: F.Fab "C6" at 218.485,44.706 h0.89 r180
C30: F.Fab "C6" at 233.481,42.85 h0.89 r90
C44: F.Fab "C6" at 201.93,81.836 h0.89 r90
H1: F.Fab "H2" at 172.008,90.829 h0.89
H3: F.Fab "H2" at 175.158,5.13 h0.89
H4: F.Fab "H2" at 248.858,5.129 h0.89
J2: F.SilkS "3.3V" at 251.867,33.046 h1
J5: Bottom 3D Body "PCB END" at 214.062,95.605 h0.5 r180
J6: F.Fab "%R" at 169.892,37.136 h1 r270
J7: F.Fab "%R" at 169.892,17.744 h1 r270
J8: F.Fab "%R" at 169.892,27.44 h1 r270
J9: F.Fab "%R" at 169.892,56.527 h1 r270
J10: F.Fab "%R" at 169.892,46.831 h1 r270
R1: F.Fab "R6" at 236.576,48.482 h0.89 r90
R2: F.Fab "R6" at 234.354,48.485 h0.89 r90
R3: F.Fab "R6" at 205.774,48.594 h0.89 r180
R4: F.Fab "R6" at 204.798,38.821 h0.89
R7: F.Fab "R6" at 210.442,54.249 h0.89 r270
R25: F.Fab "R6" at 236.496,68.173 h0.89
R27: F.Fab "R6" at 170.746,65.02 h0.89 r90
R28: F.Fab "R6" at 244.345,66.822 h0.89 r90
R32: F.Fab "R6" at 172.683,65.488 h0.89 r270
R33: F.Fab "R6" at 244.37,70.032 h0.89 r90
R37: F.Fab "R6" at 176.169,66.551 h0.89
R38: F.Fab "R6" at 247.811,67.898 h0.89 r180
R41: F.Fab "R6" at 225.118,46.943 h0.89
R42: F.Fab "R6" at 205.245,49.911 h0.89
R44: F.Fab "R6" at 225.558,49.096 h0.89 r180
R45: F.Fab "R6" at 225.532,50.797 h0.89 r180
R50: F.Fab "R6" at 225.118,45.292 h0.89
R51: F.Fab "R6" at 185.969,47.666 h0.89 r90
R67: B.Fab "L1" at 189.611,63.296 h0.89 r270
R68: B.Fab "L1" at 193.167,63.169 h0.89 r270
R69: B.Fab "L1" at 186.047,79.452 h0.89 r90
R70: B.Fab "L1" at 193.032,79.565 h0.89 r90
R71: B.Fab "L1" at 198.739,79.549 h0.89 r90
REF**: F.SilkS "10mm" at 256.477,14.031 h1 r90; F.SilkS "0" at 256.576,4.578 h1 r90; F.SilkS "5" at 256.675,9.591 h1 r90
REF**: B.SilkS "5" at 252.722,13.782 h1 r270; B.SilkS "0" at 252.821,8.769 h1 r270; B.SilkS "10mm" at 252.92,18.222 h1 r270
U24: F.CrtYd "*" at 196.206,19.959 h1.88 r90; F.CrtYd "*" at 196.206,19.959 h1.88 r90